# Altium PCB STM32_PCB.PcbDoc
Units mm, origin at the board's own origin, x right, y up, seen from the top; angles counter-clockwise.
Board outline 41.27 x 38.35 mm, 4 copper layers (L1 (Signal), L2 (GND), L3 (GND), L4 (Signal)), stack 1.57 mm thick; 34 components, 27 nets, 169 pads, 54 vias.
Unrouted connection lines stored in the file: 2.
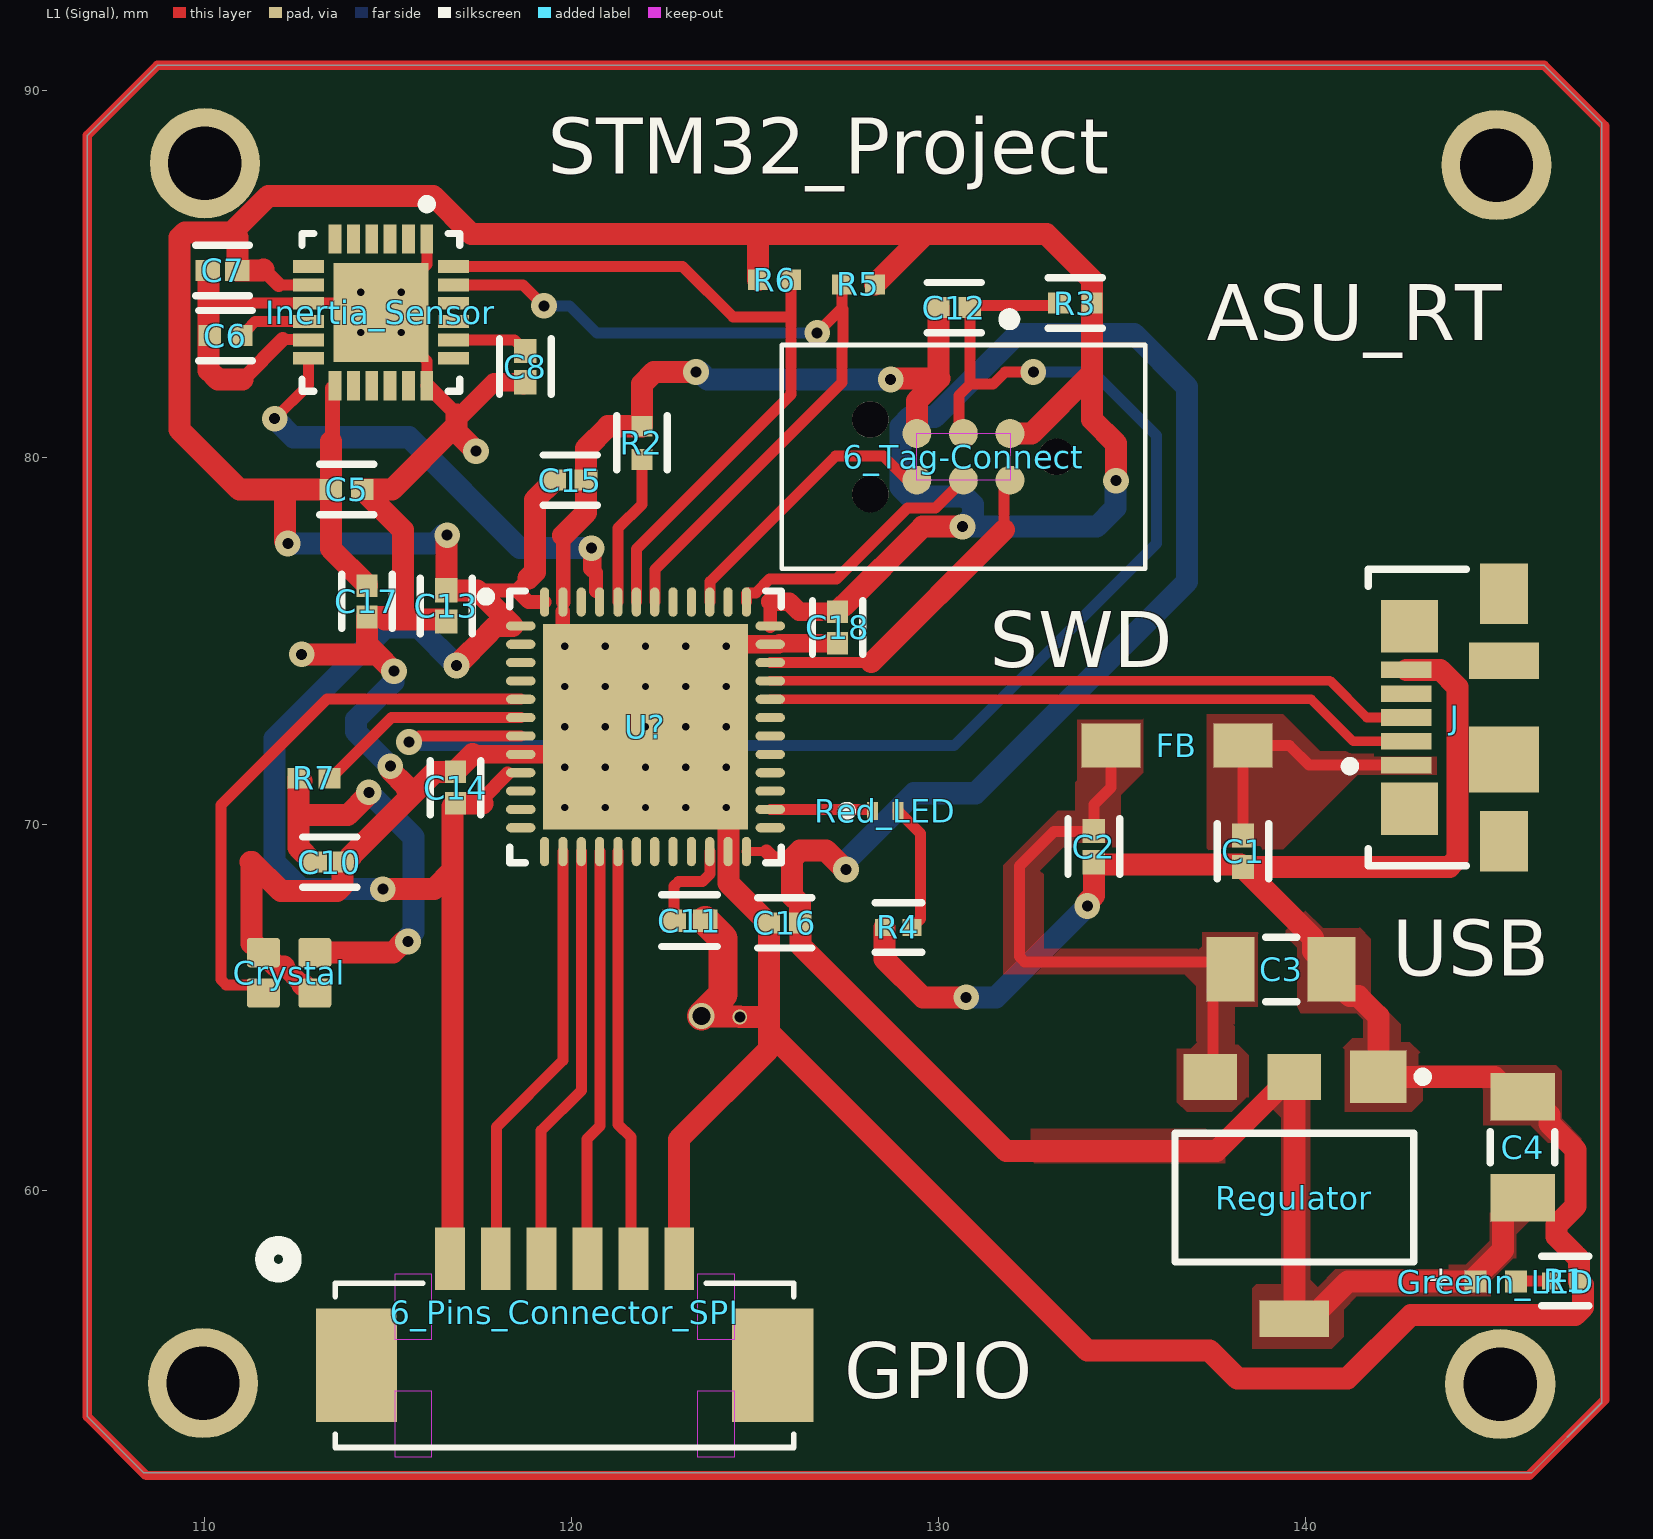
[diagram p0: L1 (Signal) view]
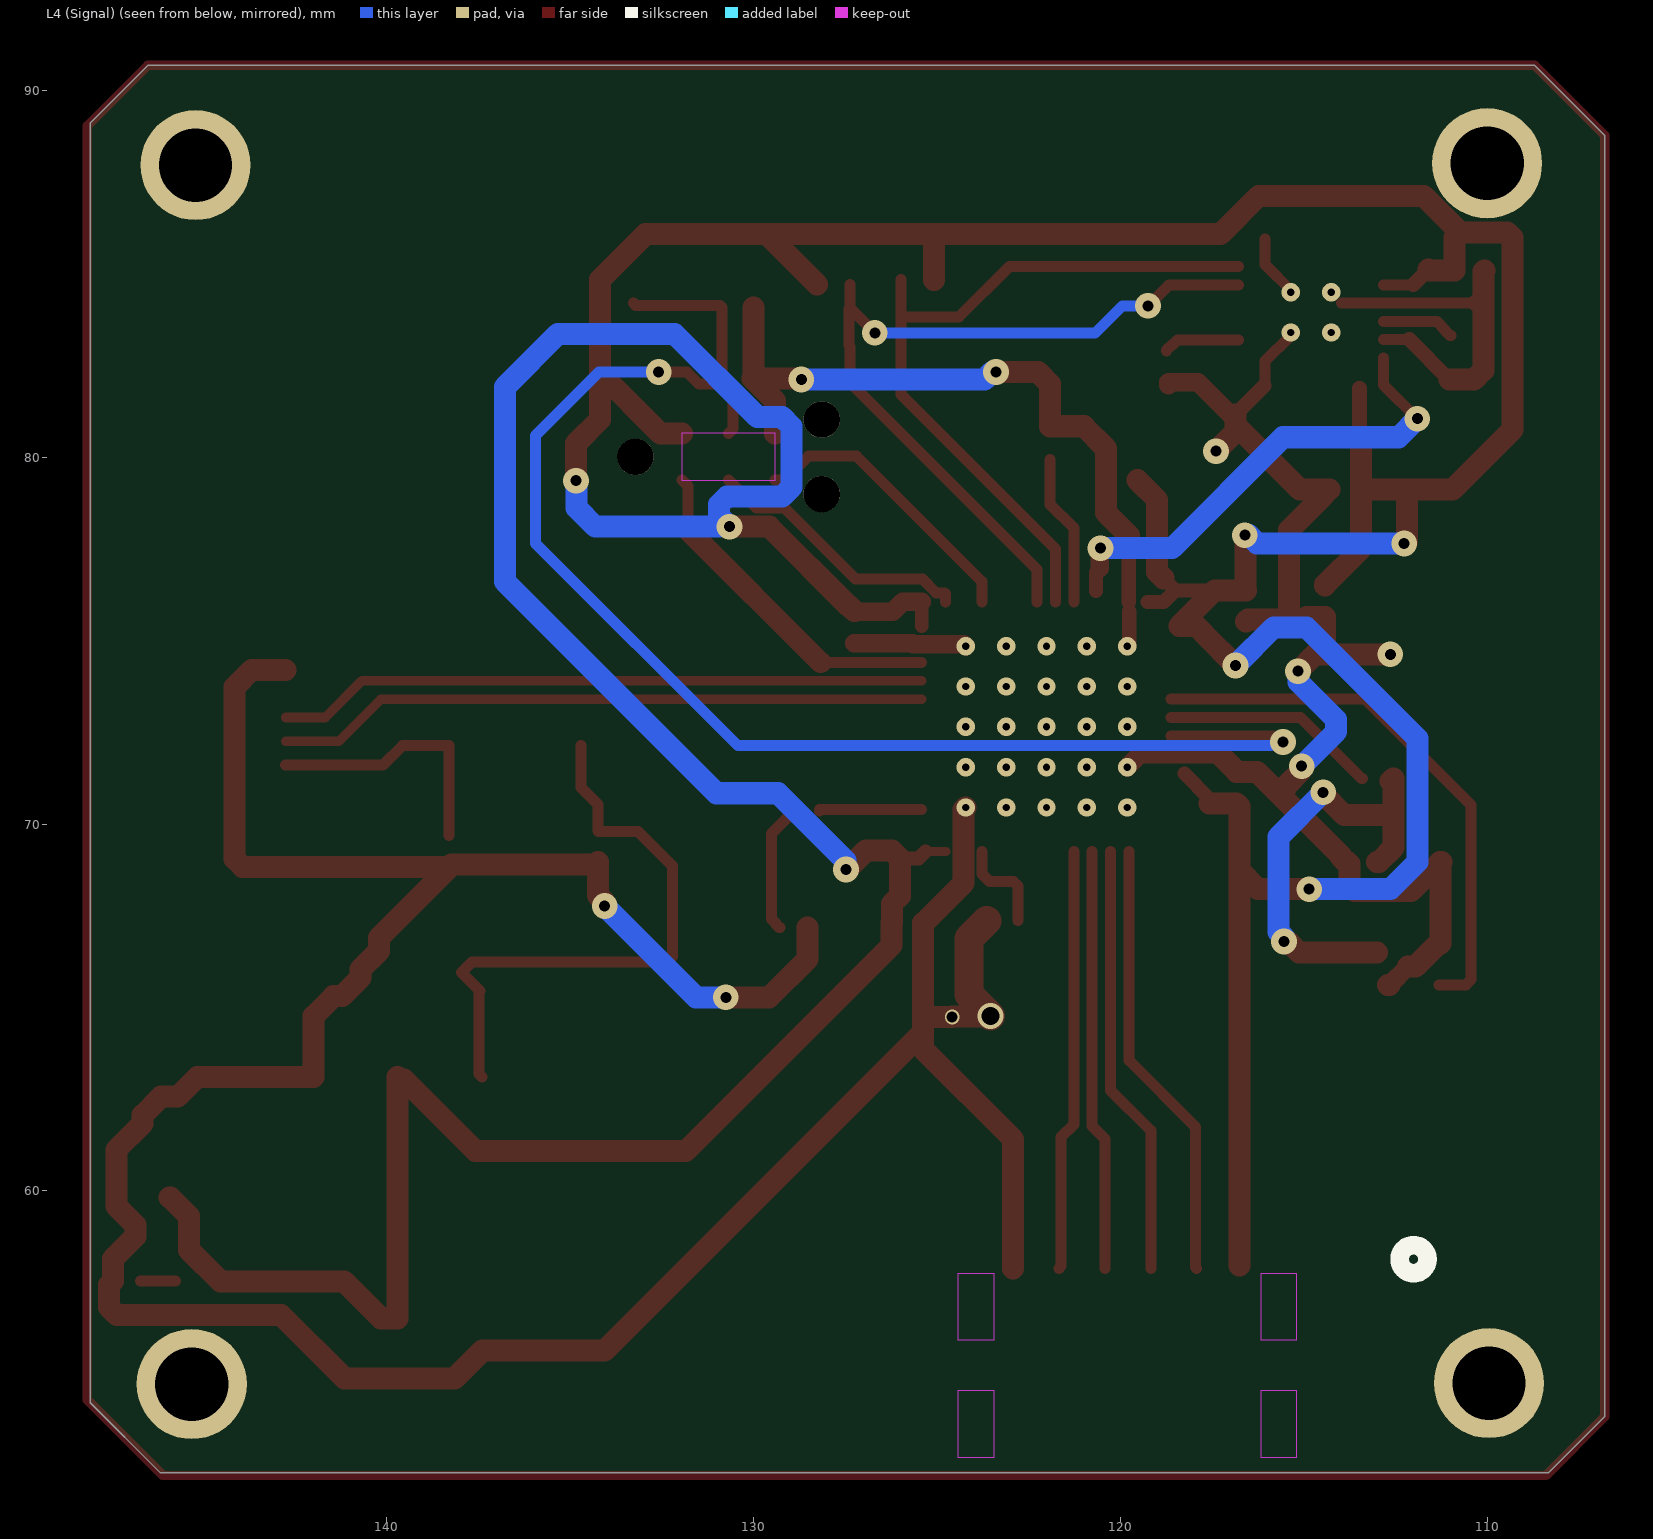
[diagram p1: L4 (Signal) view, seen from below]
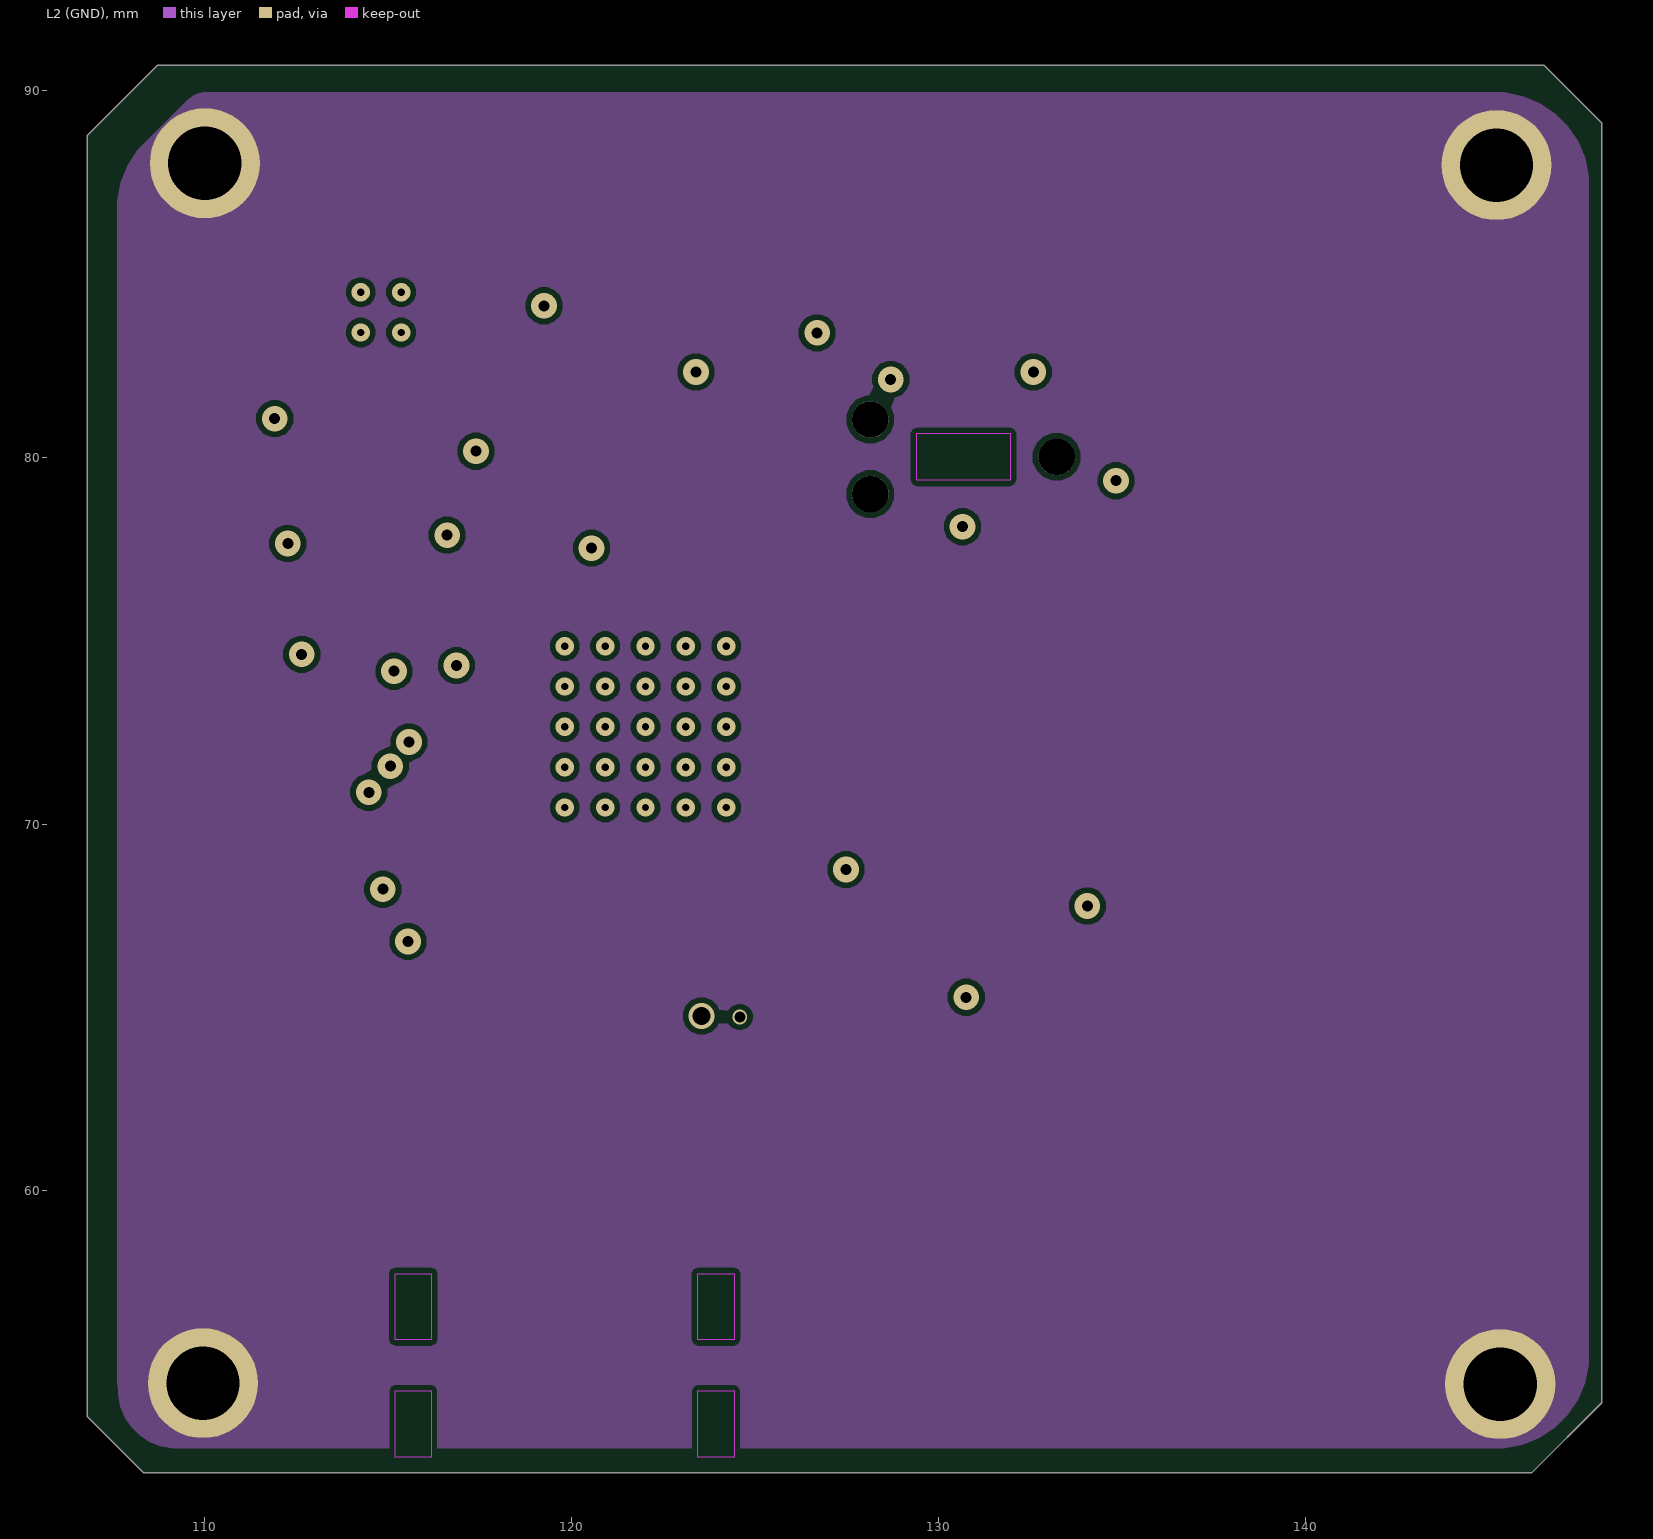
[diagram p2: L2 (GND)]
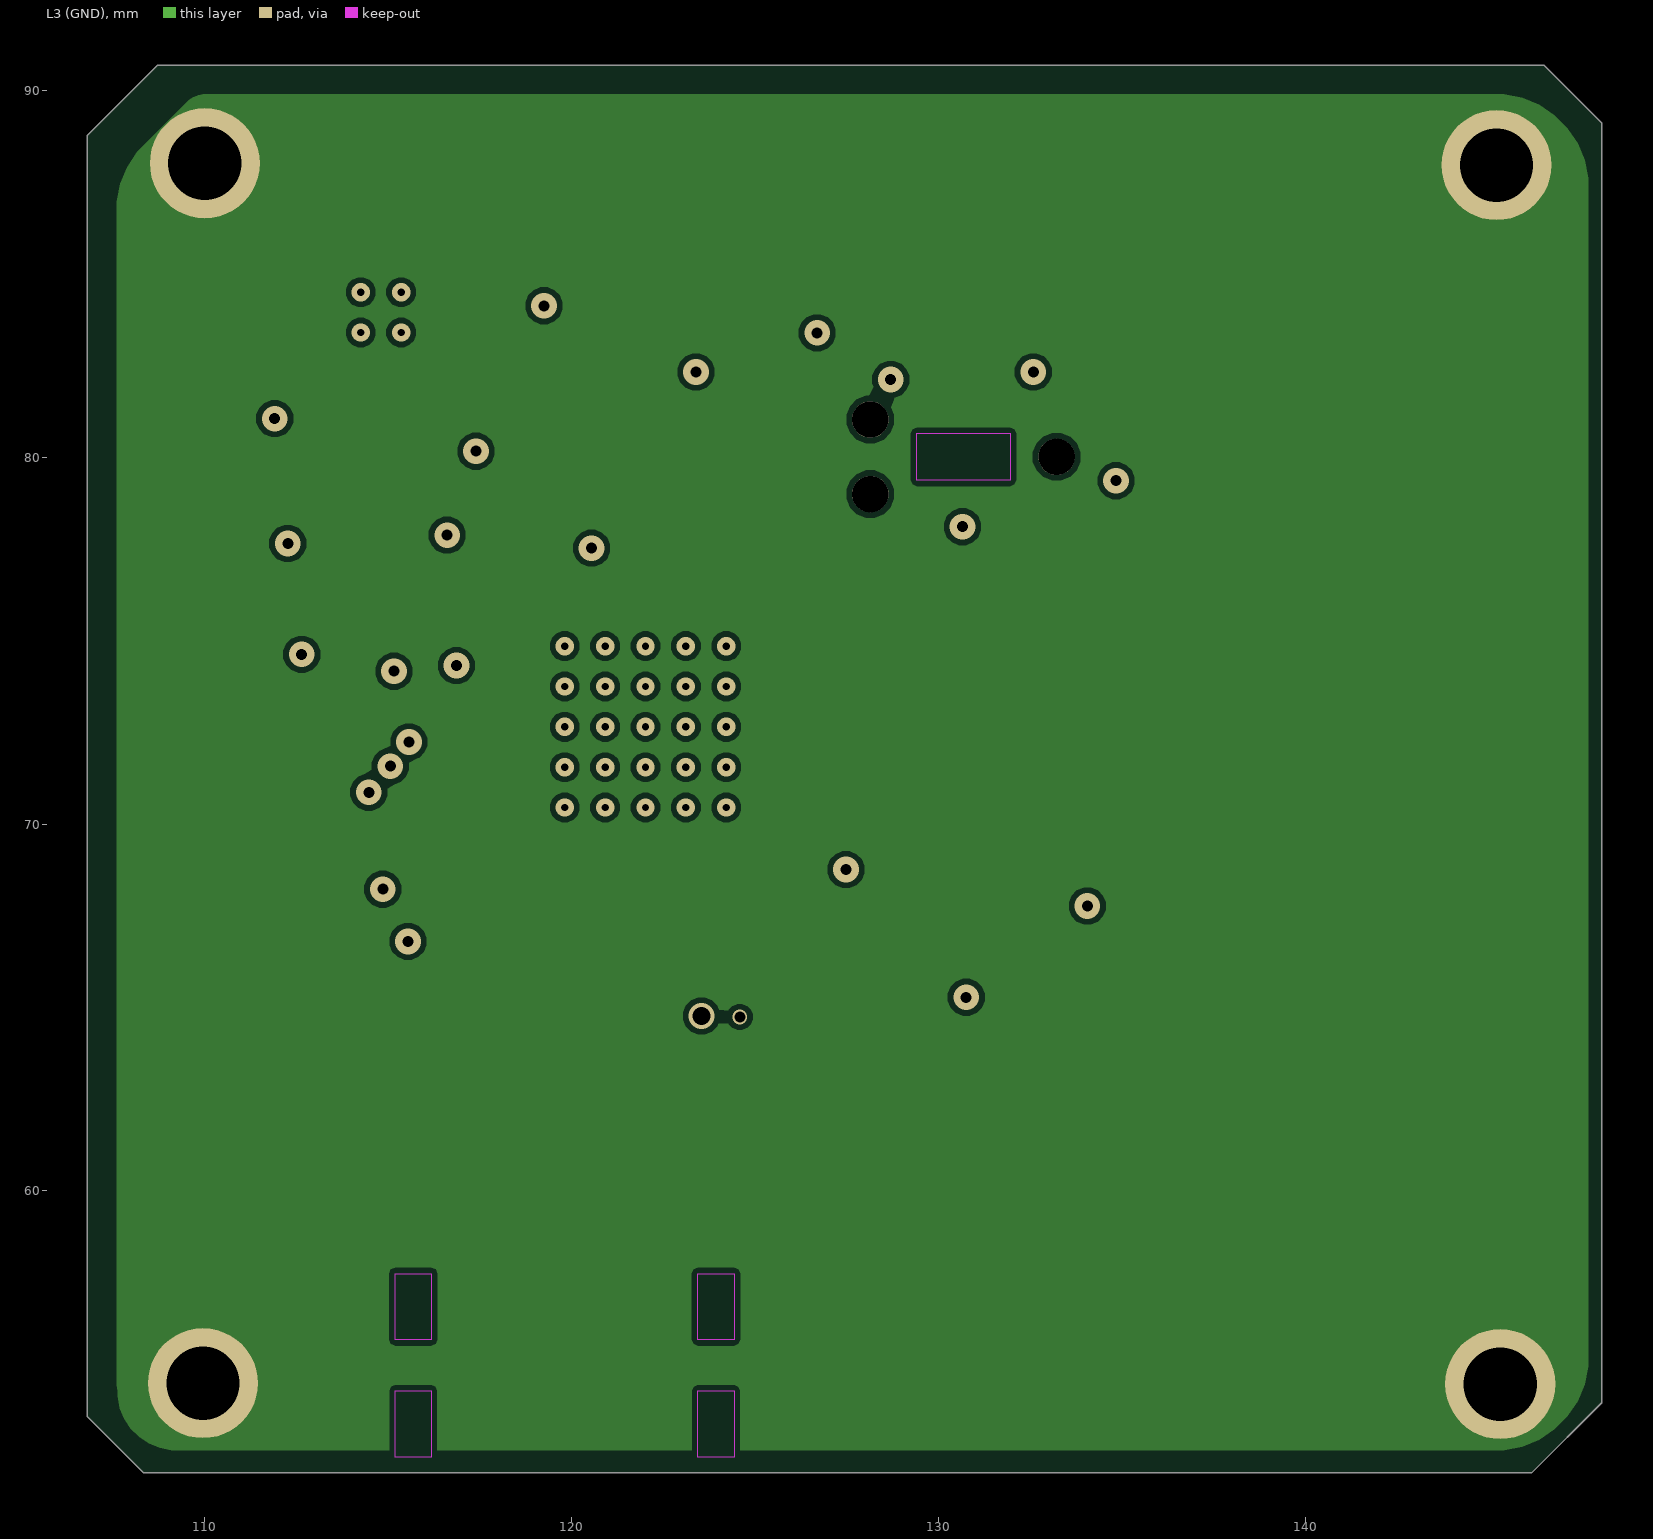
[diagram p3: L3 (GND)]
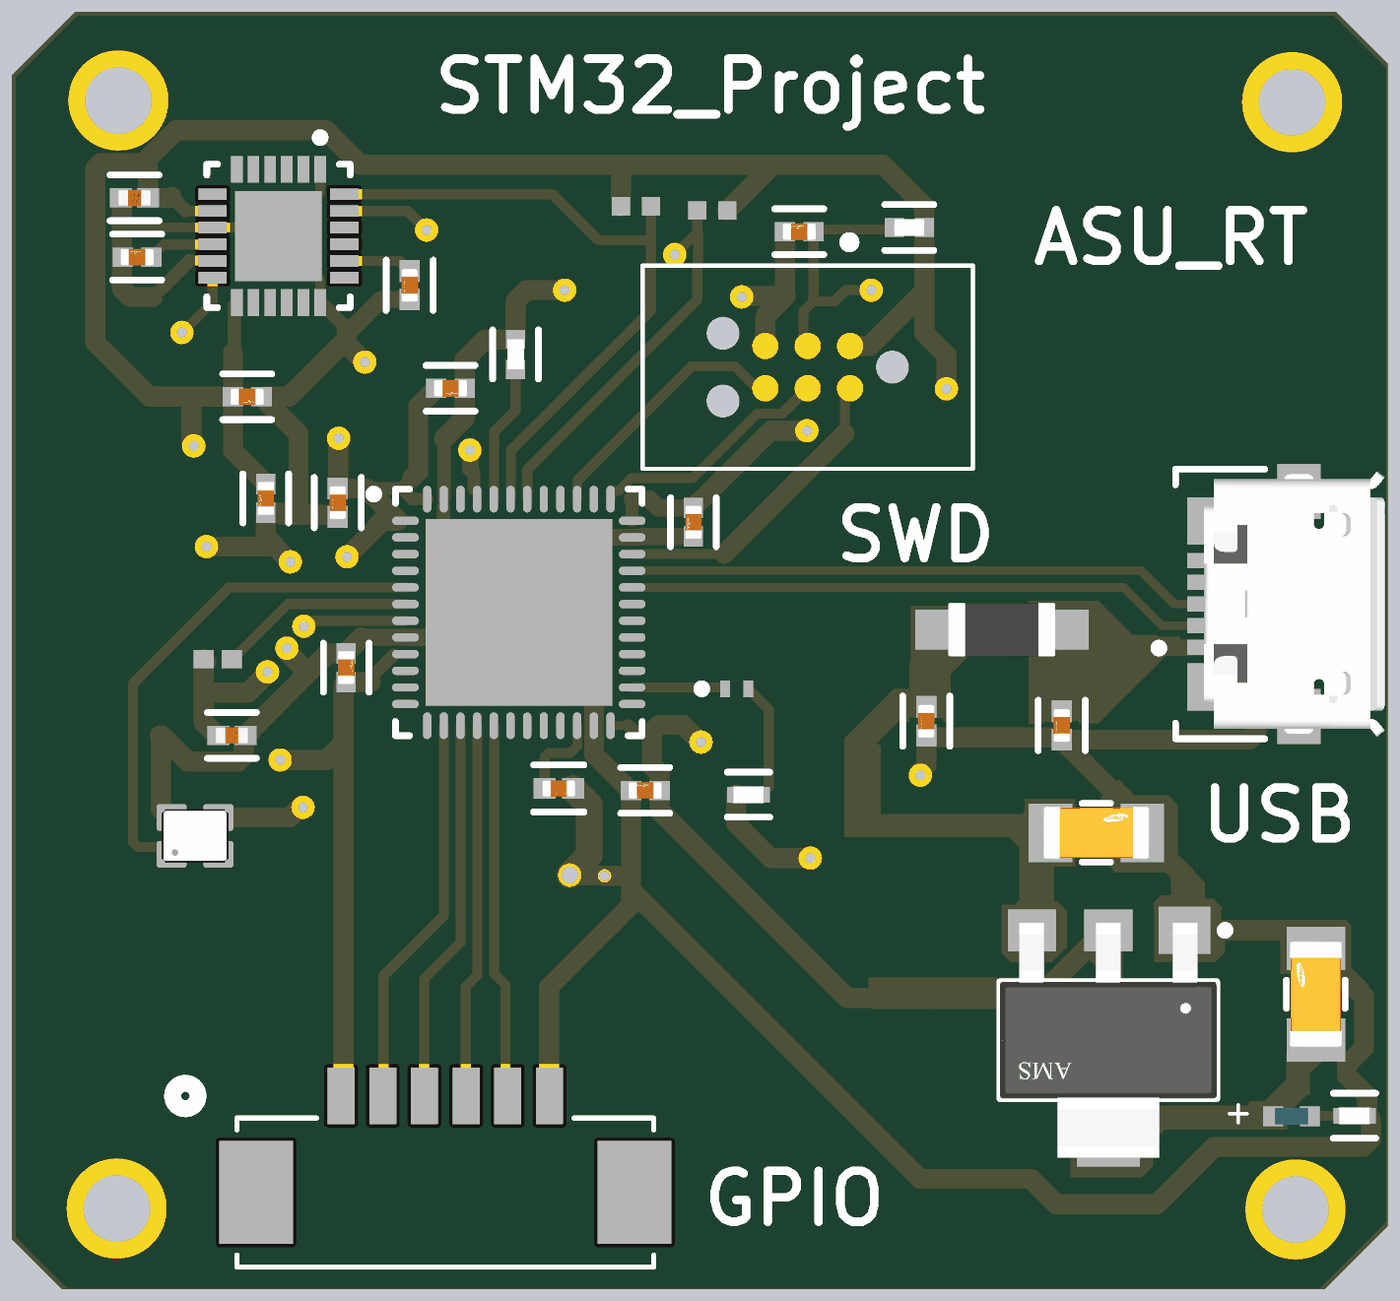
[diagram p4: 3D render of the assembled board from above, using the file's embedded part models]

## Layer stack, top to bottom
Top Solder: solder mask 0.0254, SM-001, Dk 4
L1 (Signal): signal copper 0.035
Dielectric 1: prepreg 0.2, PP-017, Dk 4.6
L2 (GND): signal copper 0.0175
Dielectric 3: core 1.065, Core-039, Dk 4.6
L3 (GND): signal copper 0.0175
Dielectric 5: prepreg 0.2, PP-017, Dk 4.6
L4 (Signal): signal copper 0.035
Bottom Solder: solder mask 0.0254, SM-001, Dk 4

## Board outline
106.807,53.848 108.331,52.324 146.177,52.324 148.082,54.229 148.082,89.108 146.512,90.678 108.712,90.678 106.807,88.773

## Design rules (kind name [scope] priority, off if disabled: settings)
Clearance Clearance_1 [InComponent('Inertia_Sensor')] p1: gap=0.15 ignorepadtopadclearanceinfootprint=TRUE
Clearance [All] p2: gap=0.15 ignorepadtopadclearanceinfootprint=TRUE
DiffPairsRouting [All] p1: maxlimit=0.254 minlimit=0.203 mostfreqgap=0.254 toplayer_maxgap=0.203 toplayer_prefgap=0.203 toplayer_minwidth=0.26 toplayer_maxwidth=0.26 toplayer_prefwidth=0.26 bottomlayer_maxgap=0.203 bottomlayer_prefgap=0.203 bottomlayer_minwidth=0.26 bottomlayer_maxwidth=0.26 bottomlayer_prefwidth=0.26 impedanceprofiledriven=TRUE impedanceprofileid={DD2EC57B-CB65-49B1-A0C3-37D0689490D2} impedanceprofilevalue=90.000000 maxuncoupledlength=12.7
MinimumSolderMaskSliver [All] p1: minsoldermaskwidth=0.1
PolygonConnect [All] p1: connectstyle=Direct reliefconductorwidth=0.254 reliefentries=4 polygonreliefangle="90 Angle" airgapwidth=0.254
RoutingVias [All] p1: holewidth=0.3 width=0.7 viastyle="Through Hole" minholewidth=0.25 minwidth=0.55 maxholewidth=0.4 maxwidth=0.9
SolderMaskExpansion [All] p1: expansion=0 istentingtop=FALSE
SupplyNets "Schematic Supply Nets_4" [InNet('GND')] p1: voltage=0.000
SupplyNets "Schematic Supply Nets_3" [InNet('VBUS')] p2: voltage=0.000
SupplyNets "Schematic Supply Nets_2" [InNet('+3v3')] p3: voltage=0.000
SupplyNets "Schematic Supply Nets_1" [InNet('+5')] p4: voltage=0.000
UnRoutedNet [All] p1: checkbadconnections=TRUE
Width [All] p1: maxlimit=1 minlimit=0.2 preferedwidth=0.3 midlayer1_minwidth=0.254 midlayer1_maxwidth=0.254 midlayer1_prefwidth=0.254 midlayer2_minwidth=0.254 midlayer2_maxwidth=0.254 midlayer2_prefwidth=0.254 minimp=50.000000 maximp=50.000000 favimp=50.000000
27 further rules are at their usual default settings.

## Classes and differential pairs
differential pair class BIFF_USB: USB_D
differential pair USB_D: +USB_D_P -USB_D_N

## Components (designator, comment, footprint, x,y, rotation, side; value= is the part's Value field where it differs from the comment)
6_Pins_Connector_SPI "532610671" CONN_532610001-SD_06_MOL 119.812,55.245 r180 top
6_Tag-Connect "TC2030-IDC-NL" TAG_TC2030-IDC-NL 130.683,80.01 r180 top
C1 "2.2uf" FP-0402-L_1_0_0_10-W_0_5-IPC_B 138.303,69.26 r270 top
C2 "2.2uf" FP-0402-L_1_0_0_10-W_0_5-IPC_B 134.239,69.387 r270 top
C3 "22uf" FP-CL31-IPC_B 139.34,66.04 r0 top
C4 "22uf" FP-CL31-IPC_B 145.923,61.193 r90 top
C5 "100nf" FP-GMD155-0_05-IPC_B 113.871,79.121 r0 top
C6 "100nf" FP-GMD155-0_05-IPC_B 110.569,83.312 r180 top
C7 "10nf" FP-C0402-BB-IPC_B 110.49,85.09 r0 top value="10,000 pF"
C8 "2n2" FP-0402-L_1_0_0_10-W_0_5-IPC_B 118.745,82.468 r270 top
C10 "10pf" FP-C0402-BB-IPC_B 113.411,68.961 r0 top value="10 pF"
C11 "2.2uf" FP-0402-L_1_0_0_10-W_0_5-IPC_B 123.218,67.368 r0 top
C12 "100nf" FP-GMD155-0_05-IPC_B 130.429,84.074 r180 top
C13 "2.2uf" FP-0402-L_1_0_0_10-W_0_5-IPC_B 116.586,75.946 r270 top
C14 "100nf" FP-GMD155-0_05-IPC_B 116.84,70.993 r90 top
C15 "100nf" FP-GMD155-0_05-IPC_B 119.967,79.375 r0 top
C16 "100nf" FP-GMD155-0_05-IPC_B 125.809,67.31 r180 top
C17 "100nf" FP-GMD155-0_05-IPC_B 114.427,76.073 r270 top
C18 "100nf" FP-GMD155-0_05-IPC_B 127.254,75.359 r270 top
Crystal "24MHZ" EPSON-FA-128_V 112.305,65.947 r90 top
FB "120R" WE-CBF_1206_L3.2W1.6H1.1_HC 136.503,72.136 r180 top
Greenn_LED "D" WL-SMCC_0402_L1W0.5H0.4 145.195,57.531 r180 top
Inertia_Sensor "MPU-6050" IS-QFN-24_V 114.808,83.947 r270 top
J "473460001" FP-473460001-MFG 145.065,72.905 r90 top (schematic designator J?)
R1 "1K" FP-CR0402-IPC_C 147.086,57.548 r180 top
R2 "10K" FP-CRCW0402-e3-IPC_B 121.92,80.391 r270 top
R3 "10K" FP-CRCW0402-e3-IPC_B 133.731,84.201 r0 top
R4 "1K" FP-CR0402-IPC_C 128.907,67.183 r180 top
R5 "2.2k" RESC1005X40X25NL05T05 127.82,84.709 r0 top
R6 "2.2k" RESC1005X40X25NL05T05 125.534,84.836 r180 top
R7 "0R" RESC1005X40X25NL05T10 112.986,71.247 r0 top value=0
Red_LED "R" PNSC-CHIP-2_V 128.555,70.358 r180 top
Regulator "AMS1117-3.3" FP-AMS1117-IPC_C 139.7,59.817 r270 top
U? "STM32F411CEU6" STM-UFQFPN48_L 122.018,72.651 r0 top

## Footprints (in the part's own frame and the unit in brackets; to place one, negate y for a bottom-side part, rotate by r counter-clockwise, add the part's x,y. Pads: shape width x height; smd on the part's side, far side on the other; paste and mask are expansions set on the pad)
CONN_532610001-SD_06_MOL [mil]
  rect 32x67 smd paste+0 mask+4.02: 1(123.03,-114.35) 2(73.82,-114.35) 3(24.61,-114.35) 4(-24.61,-114.35) 5(-73.82,-114.35) 6(-123.03,-114.35)
  rect 87x122 smd paste+0 mask+4.02: 7(-223.43,-0.18) 8(223.43,-0.18)
  Keep-Out Layer region: -142.9,27.32 -181.9,27.32 -181.9,98.32 -142.9,98.32
  Keep-Out Layer region: 181.9,27.32 142.9,27.32 142.9,98.32 181.9,98.32
  Keep-Out Layer region: -142.9,-98.67 -181.9,-98.67 -181.9,-27.67 -142.9,-27.67
  Keep-Out Layer region: 181.9,-98.67 142.9,-98.67 142.9,-27.67 181.9,-27.67
  silkscreen extent -246,-129 322,88
EPSON-FA-128_V [mm] "SMD, 4-Leads, Body 2x1.6mm, Pitch 1.45mm"
  rrect20% 0.8x0.9 smd: 1(-0.55,0.7) 2(-0.55,-0.7) 3(0.55,-0.7) 4(0.55,0.7)
  body extent -0.8,-1 0.8,1, height 0.4
FP-0402-L_1_0_0_10-W_0_5-IPC_B [mm]
  rect 0.66x0.612 smd paste+0 mask+0: 1(-0.426,0) 2(0.426,0)
  silkscreen extent -0.76,-0.71 0.76,0.71, body extent -0.91,-0.46 0.91,0.46, height 0.25
FP-473460001-MFG [mm]
  rect 0.45x1.38 smd paste+0 mask+0: 1(-1.3,2.31) 2(-0.65,2.31) 3(0,2.31) 4(0.65,2.31) 5(1.3,2.31)
  rect 1.425x1.55 smd paste+0 mask+0: 6(-2.487,2.225) 7(2.488,2.225)
  rect 1.65x1.3 smd paste+0 mask+0: 8(-3.375,-0.35) 11(3.375,-0.35)
  rect 1.8x1.9 smd paste+0 mask+0: 9(-1.15,-0.35)
  rect 1x1.9 smd paste+0 mask+0: 10(1.55,-0.35)
  silkscreen extent -4.05,0.67 4.04,3.97, body extent -4.3,-2.48 4.3,3.45, height 0.25
FP-AMS1117-IPC_C [mm]
  rect 1.425x1.55 smd paste+0 mask+0: 1(-3.295,2.29)
  rect 1.255x1.456 smd paste+0 mask+0: 2(-3.295,0) 3(-3.295,-2.29)
  rect 1x1.9 smd paste+0 mask+0: 4(3.295,0)
  silkscreen extent -3.42,-3.25 1.75,3.63, body extent -3.9,-3.35 3.9,3.35, height 0.25
FP-C0402-BB-IPC_B [mm]
  rect 0.665x0.572 smd paste+0 mask+0: 1(-0.404,0) 2(0.404,0)
  silkscreen extent -0.74,-0.69 0.74,0.69, body extent -0.89,-0.44 0.89,0.44, height 0.25
FP-CL31-IPC_B [mm]
  rect 1.305x1.758 smd paste+0 mask+0: 1(-1.376,0) 2(1.376,0)
  silkscreen extent -0.42,-0.88 0.42,0.88, body extent -2.28,-1.13 2.28,1.13, height 0.25
FP-CR0402-IPC_C [mm]
  rect 0.515x0.472 smd paste+0 mask+0: 1(-0.379,0) 2(0.379,0)
  silkscreen extent -0.64,-0.67 0.64,0.67, body extent -0.74,-0.38 0.74,0.38, height 0.25
FP-CRCW0402-e3-IPC_B [mm]
  rect 0.568x0.572 smd paste+0 mask+0: 1(-0.452,0) 2(0.452,0)
  silkscreen extent -0.74,-0.69 0.74,0.69, body extent -0.89,-0.44 0.89,0.44, height 0.25
FP-GMD155-0_05-IPC_B [mm]
  rect 0.615x0.572 smd paste+0 mask+0: 1(-0.429,0) 2(0.429,0)
  silkscreen extent -0.74,-0.69 0.74,0.69, body extent -0.89,-0.44 0.89,0.44, height 0.25
IS-QFN-24_V [mm] "QFN, 24-Leads, Body 4x4mm, Pitch 0.5mm, Thermal Pad 2.7x2.6mm"
  rect 0.8x0.35 smd: 1(-2,1.25) 2(-2,0.75) 3(-2,0.25) 4(-2,-0.25) 5(-2,-0.75) 6(-2,-1.25) 13(2,-1.25) 14(2,-0.75) 15(2,-0.25) 16(2,0.25) 17(2,0.75) 18(2,1.25)
  rect 0.35x0.85 smd mask+0.102: 7(-1.25,-1.975) 8(-0.75,-1.975) 9(-0.25,-1.975) 10(0.25,-1.975) 11(0.75,-1.975) 12(1.25,-1.975) 19(1.25,1.975) 20(0.75,1.975) 21(0.25,1.975) 22(-0.25,1.975) 23(-0.75,1.975) 24(-1.25,1.975)
  rect 2.7x2.6 smd: 25(0,0)
  silkscreen extent -3.07,-2.15 2.15,2.15, body extent -2,-2 2,2, height 0.95
PNSC-CHIP-2_V [mm] "CHIP, 2-Leads, Body 1x0.5mm, Pitch 0.7mm"
  rect 0.3x0.5 smd: 1(0.35,0) 2(-0.35,0)
  silkscreen extent 0.92,-0.12 1.17,0.12, body extent -0.5,-0.25 0.5,0.25, height 0.25
RESC1005X40X25NL05T05 [mm] "Chip Resistor, 2-Leads, Body 1.00x0.50mm, IPC Medium Density"
  rect 0.55x0.55 smd: 1(-0.45,0) 2(0.45,0)
  body extent -0.53,-0.27 0.53,0.28, height 0.4
RESC1005X40X25NL05T10 [mm] "Chip Resistor, 2-Leads, Body 1.00x0.50mm, IPC Medium Density"
  rect 0.6x0.55 smd: 1(-0.425,0) 2(0.425,0)
  body extent -0.53,-0.27 0.53,0.28, height 0.4
STM-UFQFPN48_L [mm] "QFN, 48-Leads, Body 7.1x7.1mm, Pitch 0.5mm, Thermal Pad 5.6x5.6mm, IPC High Density"
  oval 0.8x0.25 smd: 1(-3.4,2.75) 2(-3.4,2.25) 3(-3.4,1.75) 4(-3.4,1.25) 5(-3.4,0.75) 6(-3.4,0.25) 7(-3.4,-0.25) 8(-3.4,-0.75) 9(-3.4,-1.25) 10(-3.4,-1.75) 11(-3.4,-2.25) 12(-3.4,-2.75) 25(3.4,-2.75) 26(3.4,-2.25) 27(3.4,-1.75) 28(3.4,-1.25) 29(3.4,-0.75) 30(3.4,-0.25) 31(3.4,0.25) 32(3.4,0.75) 33(3.4,1.25) 34(3.4,1.75) 35(3.4,2.25) 36(3.4,2.75)
  oval 0.25x0.8 smd: 13(-2.75,-3.4) 14(-2.25,-3.4) 15(-1.75,-3.4) 16(-1.25,-3.4) 17(-0.75,-3.4) 18(-0.25,-3.4) 19(0.25,-3.4) 20(0.75,-3.4) 21(1.25,-3.4) 22(1.75,-3.4) 23(2.25,-3.4) 24(2.75,-3.4) 37(2.75,3.4) 38(2.25,3.4) 39(1.75,3.4) 40(1.25,3.4) 41(0.75,3.4) 42(0.25,3.4) 43(-0.25,3.4) 44(-0.75,3.4) 45(-1.25,3.4) 46(-1.75,3.4) 47(-2.25,3.4) 48(-2.75,3.4)
  rect 5.6x5.6 smd: 49(0,0)
  silkscreen extent -4.47,-3.7 3.7,3.7, body extent -3.55,-3.55 3.55,3.55, height 0.6
TAG_TC2030-IDC-NL [mil]
  round 30.98 smd paste-39.37: 1(-50,-25) 2(-50,25) 3(0,-25) 4(0,25) 5(50,-25) 6(50,25)
  round 39.02 hole 39.02 unplated: ""(-100,0) ""(100,-40) ""(100,40)
  Keep-Out Layer region: 50,-25.03 -50.06,-25.03 -50.06,25 50,25
  silkscreen extent -195,-154 195,120
WE-CBF_1206_L3.2W1.6H1.1_HC [mm] "SMD EMI Suppression Ferrite  Bead, body 3.20x1.60mm"
  rect 1.6x1.2 smd: 1(-1.8,0) 2(1.8,0)
  body extent -1.6,-0.8 1.6,0.8, height 1.1
WL-SMCC_0402_L1W0.5H0.4 [mm] "SMD Mono-color Chip LED Compact, body 1x0.5mm"
  rect 0.6x0.6 smd: 1(-0.55,0) 2(0.55,0)
  body extent -0.5,-0.25 0.5,0.25, height 0.4

## Part data
6_Pins_Connector_SPI: "Conn Shrouded Header (4 Sides) HDR 6 POS 1.25mm Solder RA Side Entry SMD PicoBladeâ„¢ T/R", Package=None, Check_prices=https://www.snapeda.com/parts/532610671/Molex/view-part/?ref=eda, MF=Molex, MP=532610671, SnapEDA_Link=https://www.snapeda.com/parts/532610671/Molex/view-part/?ref=snap
6_Tag-Connect: "CABLE ADAPTER 6 POS", Package=None, Availability=Unavailable, MP=TC2030-IDC-NL, Price=None
C1 C2 C8 C11 C13: library part CMP-14477-003358-2, "None", Capacitance=2.2uF, Case Code (Imperial)=0402, Case Code (Metric)=1005, Dielectric=X5R, Max Operating Temperature=85°C, Min Operating Temperature=-55°C, Package Quantity=1, Resistor Type=Ceramic, Tolerance=20%, Voltage Rating=16V, Case/Package=0402, Halogen Free="Halogen Free", Height=0.5mm, Lead Free="Lead Free", Length=1mm, Mount="Surface Mount", Packaging="Tape and Reel", RoHS Compliant=Yes, Termination=SMD/SMT, Thickness=0.022inch, Voltage Rating (DC)=16V, Width=0.02inch
C3 C4: library part CMP-13271-003943-1, "Cap Ceramic 22uF 16V X6S ±10% SMD 1206 +105°C Embossed T/R", Capacitance=22uF, Case Code (Imperial)=1206, Case Code (Metric)=3216, Dielectric=X6S, Max Operating Temperature=105°C, Min Operating Temperature=-55°C, Package Quantity=1, Tolerance=10%, Voltage Rating=16V, Case/Package=1206, Depth=1.6mm, Height=1.6mm, Length=3.2mm, Mount="Surface Mount", Packaging="Tape and Reel", Radiation Hardening=No, Thickness=0.071inch, Width=0.063inch
C5 C6 C12 C14 C15 C16 C17 C18: library part CMP-06035-061958-1, "Wire Bonding/AuSn Soldering Mount Chip Multilayer Ceramic Capacitors for General Purpose, 0402, 0.10uF, X5R, 15%, 20%, 16V"
C7: library part CMP-2008-03066-2, "Multilayer Ceramic Capacitor, C Series, 0.01 - F, - 5%, X7R, 16 V, 0402 [1005 Metric] Rohs Compliant: Yes", Capacitance="10,000 pF", Manufacturer=Kemet, Manufacturer Part Number=C0402C103J4RACTU, Package=C0402-BB, Temperature="-55°C to +125°C", Temperature Characteristic=X7R, Temperature Coefficient=15%, Temperature Range High=+125°C, Temperature Range Low=-55°C, Tolerance=0.05, Voltage Rating="16 V", Automotive=No, Category=Cap, ComponentLink2Description=Datasheet, ComponentLink2URL=https://content.kemet.com/datasheets/KEM_C1002_X7R_SMD.pdf, Device Class L1="Passive Components", Device Class L2=Capacitors, Device Class L3="Ceramic Capacitors", Digikey Description="Multilayer Ceramic Capacitor, C Series, 0.01 - F, - 5%, X7R, 16 V, 0402 [1005 Metric] Rohs Compliant: Yes", Height=0.55mm, Ipc Land Pattern Name=CAPC10050X50, Lead Free=Yes, Material=Ceramic, Mouser Description="Multilayer Ceramic Capacitors MLCC - SMD/SMT 16volts 10000pF X7R 5%", Octopart=https://octopart.com/c0402c103j4ractu-kemet-128602, RoHS=TRUE
C10: library part CMP-03020-005426-2, "CAP CER 10PF 16V NP0 0402", Capacitance="10 pF", Manufacturer=Kemet, Manufacturer Part Number=C0402C100J4GAC7867, Package=C0402-BB, Temperature="-55°C to +125°C", Temperature Characteristic=C0G, Temperature Coefficient=15%, Temperature Range High=+125°C, Temperature Range Low=-55°C, Tolerance=0.05, Voltage Rating="16 V", Automotive=No, Category=Cap, ComponentLink2Description=Datasheet, ComponentLink2URL=https://content.kemet.com/datasheets/KEM_C1002_X7R_SMD.pdf, Device Class L1="Passive Components", Device Class L2=Capacitors, Device Class L3="Ceramic Capacitors", Digikey Description="CAP CER 10PF 16V NP0 0402", Height=0.55mm, Ipc Land Pattern Name=CAPC10050X50, Lead Free=Yes, Material=Ceramic, Octopart=https://octopart.com/c0402c100j4gac7867-kemet-1500972, RoHS=TRUE
Crystal: library part CMP-003-00028-1, "Crystal, 24 MHz, +/- 10 ppm, -20 to 75 degC, 4-Pin SMD, RoHS, Tape and Reel", Case/Package=SMD/SMT, Frequency=24MHz, Load Capacitance=12pF, Max Operating Temperature=75°C, Min Operating Temperature=-20°C, ESR=80, Mounting Technology=SMT, Pins=4, RoHS Compliant=Yes
FB: library part CMP-0220-00020-2, Case Code (Imperial)=1206, Case Code (Metric)=3216, Case/Package=SMD/SMT, Current Rating=3A, DC Resistance (DCR)=30mΩ, Inductance=20.8nH, Max Operating Temperature=125°C, Min Operating Temperature=-55°C, Test Frequency=100MHz, Tolerance=25%, Core Material=Ferrite, Depth=1.6mm, Height=1.1mm, Impedance=120Ω, Lead Free="Lead Free", Length=3.2mm, Max Current Rating=3A, Max DC Current=3A, Mount="Surface Mount", NexarPartId=7861705, Number of Lines=1, Packaging=Digi-Reel®, REACH SVHC=Unknown, Resistance=30mΩ, RoHS=Compliant, Shielding=Unshielded, Termination=SMD/SMT, Weight=28.009329mg, Width=1.6mm
Greenn_LED: library part CMP-03913-90235559-3, "Wurth Elektronik LED, WL-SMCC, 1005 (0402), 570 nm, 1 x 0.5 x 0.4mm", Case/Package=0402, Color=Green, Forward Current=60mA, Forward Voltage=2V, Manufacturer Lifecycle Status=ACTIVE, Max Junction Temperature (Tj)=95°C, Max Operating Temperature=85°C, Max Reverse Voltage (DC)=5V, Min Operating Temperature=-40°C, Power Dissipation=75mW, Dominant Wavelength=570nm, Height=400µm, Length=1mm, Lifecycle Status=Production, Luminous Intensity=50mcd, Packaging="Tape and Reel", Peak Wavelength=572nm, Reverse Voltage=5V, RoHS=Compliant, Viewing Angle=120°, Wavelength=570nm, Width=500µm, YEOL="1 = Estimated lifetime > 10 years"
Inertia_Sensor: library part CMP-1753-00002-2, "3-Axis Gyroscope, Accelerometer and a Digital Motion Processor(TM) (DMP), 2.375 to 3.46 V, -40 to 85 degC, 24-Pin QFN, RoHS, Tape and Reel", Manufacturer=InvenSense, Standard Package=5,000, Category=Sensors,Transducers, Datasheet URL=http://datasheet.octopart.com/MPU-6050-InvenSense-datasheet-14421344.pdf, Datasheet Version="Rev. 3.3, 05/2012", Dynamic Catalog=MPU-6000™Series, Family=Multifunction, Featured Product=MPU-60506-Axis,IntegratedI²CSolution, Manufacturer URL=http://www.invensense.com/, Online Catalog=MPU-6000™Series, Other Names="1428-1007-2 / MPU6050", Output Type=Digital, Sensor Type=MotionTracking, Unit PriceUSD=Digital
J: library part CMP-2000-05246-2, "CONN RCPT USB2.0 MICRO B SMD R/A", Current Rating=1.8A, Manufacturer=Molex, Package=0, Temperature="-30°C to +85°C", Temperature Range High=+85°C, Temperature Range Low=-30°C, Voltage Rating=30V, Automotive=No, Category=Conn, ComponentLink2Description=Datasheet, ComponentLink2URL=https://www.molex.com/webdocs/datasheets/pdf/en-us/0473460001_IO_CONNECTORS.pdf, Conn Orientation="Right Angle", Contact Material=Gold,Nickel, Device Class L1=Connectors, Device Class L2="USB Connectors", Device Class L3=unset, Digikey Description="CONN RCPT USB2.0 MICRO B SMD R/A", Footprint Url=https://www.molex.com/pdm_docs/sd/473460001_sd.pdf, Height=2.945mm, Is Female=yes, Lead Free=Yes, Manufacturer Part Number=473460001, Number Of Contacts=5, Octopart=https://octopart.com/47346-0001-molex-7164928, Pitch=0.65mm, RoHS=TRUE, Shielding=true, Usb Standard="USB 2.0"
R1 R4: library part CMP-2002-05519-2, "Thick Film Chip Resistors 0402 1kΩ 0.0625W 5% 200ppm/°C", Case Code (Imperial)=0402, Case Code (Metric)=1005, Max Operating Temperature=125°C, Max Power Dissipation=63mW, Min Operating Temperature=-55°C, Package Quantity=10000, Power Rating=62.5mW, Resistance=1kR, Temperature Coefficient=200ppm/°C, Tolerance=5%, Voltage Rating=50V, Case/Package=0402, Composition="Thick Film", Contact Plating=Tin, Depth=0.5mm, Height=0.016inch, Length=1mm, Military Standard=Not, Mount="Surface Mount", Number of Terminations=2, Packaging="Tape and Reel", Radiation Hardening=No, Termination=SMD/SMT, Thickness=356um, Width=0.02inch
R2 R3: library part CMP-2002-08136-3, "RES Thick Film, 10kΩ, 5%, 0.063W, 200ppm/°C, 0402", Case Code (Imperial)=0402, Case Code (Metric)=1005, Max Operating Temperature=155°C, Max Power Dissipation=63mW, Min Operating Temperature=-55°C, Package Quantity=1, Resistance=10kR, Temperature Coefficient=200ppm/°C, Tolerance=5%, Voltage Rating=50V, Case/Package=0402, Composition="Thick Film", Contact Plating=Tin, Depth=0.5mm, Features="Automotive AEC-Q200", Height=0.016inch, Length=1mm, Military Standard=Not, Mount="Surface Mount", Number of Terminations=2, Packaging="Tape and Reel", Power Rating=63mW, Radiation Hardening=No, Termination=SMD/SMT, Weight=2.3E-05oz, Width=0.5mm
R5 R6: library part CMP-2002-08453-1, Manufacturer="Vishay Dale", Part Number=CRCW04022K20JNED
R7: library part CMP-009-00008-5, "Chip Resistor, 0 Ohm, 0.25 W, -55 to 155 degC, 1206 (3216 Metric)", Case/Package=1206, Max Operating Temperature=155°C, Min Operating Temperature=-55°C, Power=250mW, Tolerance=0.05%, Voltage Rating=200V, Mounting Technology=SM, Pins=2, RoHS Compliant=True
Red_LED: library part CMP-0456-00001-2, "Hight Bright Surface Mounting Chip LED (Red), 55 mW, -30 to 85 degC, 1.0 x 0.5 x 0.2 mm  SMD", Forward Voltage="1.95 V", Manufacturer=Panasonic, PartNumber=LNJ247W82RA, Reverse Current="100 uA", ComponentLink1Description="Manufacturer URL", ComponentLink1URL=http://www.semicon.panasonic.co.jp/en/, ComponentLink2Description=Datasheet, ComponentLink2URL=http://www.semicon.panasonic.co.jp/ds4/LNJ247W82RA_E.pdf, ComponentLink3Description="Package Specification", ComponentLink3URL=http://www.semicon.panasonic.co.jp/ds4/LNJ247W82RA_E.pdf, Dominant Emission Wavelength="630 nm", Luminous Intensity="16 mcd", Mounting Technology="Surface Mount", PackageDescription="2-Pin CHIP, Body 1x0.5mm, Pitch 0.7mm", PackageReference=CHIP-2, Peak Emission Wavelength="645 nm", Spectral half band width="20 nm"
Regulator: library part CMP-209535-000001-1, "LDO Voltage Regulators 1A, 3.3V", Dropout Voltage=1.1V, Manufacturer="Advanced Monolithic Systems", Max Junction Temp=+125°C, Max Power Dissipation=1.2W, Max Supply Voltage=15V, Nominal Supply Current=5mA, Output Current=1A, Output Voltage=3.3V, Package=AMS1117, Supplier Part Number=1241867P, Temperature="-40°C to +125°C", Temperature Range Low=-40°C, Automotive=No, Category=IC, ComponentLink2Description=Datasheet, ComponentLink2URL=http://www.advanced-monolithic.com/pdf/ds1117.pdf, Device Class L1="Integrated Circuits (ICs)", Device Class L2="Power Management ICs", Device Class L3="Voltage Regulators - Linear", Height=1.8mm, Ipc Land Pattern Name=SOT229P700X180-4, Lead Free=Yes, Manufacturer Part Number=AMS1117-3.3, Number Of Outputs=1, Octopart=https://octopart.com/ams1117-3.3-advanced+monolithic+systems-25899300, Output Type=Fixed, RoHS=TRUE, Standoff Height=0.64mm, Supplier=RS, Temperature Range High=+125°C
U?: library part CMP-0243-00165-1, "ARM Cortex-M4 32-bit MCU+FPU, 512 KB Flash, 128 KB RAM, 36 I/Os, 48-Pin UFQFPN, -40 to 85 degC, Tray", I/Os (High Current)=36, Operating Frequency(F) (Processor speed) (MHz)=100, Package Description=UFQFPN48, Package Reference="48-Pin Ultra Thin Fine Pitch Quad Flat No-Lead, 7 x 7 x 0.6 mm Body, 0.5 mm Pitch, Exposed Pad", Supply Voltage(Vcc) min (V)=1.7, ComponentLink1Description="Manufacturer URL", ComponentLink1URL=http://www.st.com/, ComponentLink2Description=Datasheet, ComponentLink2URL=http://www.st.com/st-web-ui/static/active/en/resource/technical/document/datasheet/DM00115249.pdf, Core="ARM Cortex-M4", DatasheetVersion="Rev. 6", FLASH Size (Prog) (kB)=512, Internal RAM Size (kB)=128, Mounting Technology="Surface Mount", Packing=Tray

## Free pads (board coordinates)
  round 3 hole 2: 3(145.212,87.96) 5(109.957,54.762) 6(110.007,88.011) 7(145.313,54.737)
  round 1.524 hole 0.762: 4(109.957,54.762)

## Via types
v1: diameter 0.5, hole 0.2, L1 (Signal) to L4 (Signal), 29 vias
v2: diameter 0.7, hole 0.3, L1 (Signal) to L4 (Signal), 23 vias
v3: diameter 0.7, hole 0.5, L1 (Signal) to L4 (Signal), 1 vias
v4: diameter 0.4, hole 0.3, L1 (Signal) to L4 (Signal), 1 vias

## Nets (pads, with @x,y where several pads share a name; then routed paths per layer and width w, separated by ;. In a path a pad name is that pad's centre, name@x,y a point inside that pad or via, vN(x,y) a via of type N, cw(c..) or ccw(c..) an arc to the next point about the centre after c; other vN are vias at no path point)
+3v3: 6_Pins_Connector_SPI.1 6_Tag-Connect.1 C4.1 C5.1 C7.2 C13.1 C14.1 C15.1 C16.1 C17.1 C18.1 Greenn_LED.2 Inertia_Sensor.8 Inertia_Sensor.13 R3.2 R5.2 R6.2 Regulator.2 Regulator.4 U?.1 U?.9 U?.24 U?.36 U?.48 | length 184.8
  L1 (Signal) w0.254: U?.24 125.313,69.251
  L1 (Signal) w0.3: 112.026,84.697 Inertia_Sensor.8
  L1 (Signal) w0.381: 117.43,76.372 118.501,76.372 ; 117.576,70.564 117.576,70.688 U?.9@118.262,71.374 ; 118.829,76.7 118.501,76.372 ; U?.48 118.823,76.051 118.501,76.372 ; 125.313,69.251 125.506,69.058 126.014,69.058 ; U?.36 125.418,76.059
  L1 (Signal) w0.4: 111.602,85.121 112.026,84.697 ; 113.487,80.432 Inertia_Sensor.13@113.487,81.876
  L1 (Signal) w0.508: 125.418,76.059 125.934,76.059 126.205,75.787 C18.1
  L1 (Signal) w0.6: 111.602,85.121 111.571,85.09 C7.2 110.894,85.982 110.747,86.129 ; v2(112.268,77.648) 112.195,77.721 112.195,79.121 ; 113.443,80.432 C5.1 ; C17.1 114.427,76.523 113.443,77.507 C5.1 ; v2(114.859,68.224) 116.25,68.224 116.758,68.732 ; v2(116.611,77.876) 116.599,77.864 116.599,76.385 C13.1 117.43,76.372 118.399,75.404 117.94,75.404 117.72,75.184 117.72,75.175 v2(116.865,74.32) ; 6_Pins_Connector_SPI.1@116.758,57.973 116.758,68.732 ; 117.576,70.564 C14.1 116.758,70.482 116.758,68.732 ; 118.829,76.7 119.001,76.872 119.001,78.837 C15.1 ; R6.2 125.084,85.917 125.247,86.081 ; C18.1@127.254,75.809 127.39,75.945 127.412,75.945 129.572,78.105 v2(130.658,78.105) ; v2(127.482,68.76) 127.455,68.76 126.937,69.278 126.233,69.278 126.014,69.058 126.014,68.046 126.233,67.827 126.233,67.315 C16.1 126.238,66.7 131.851,61.087 137.574,61.087 139.523,63.036 139.624,63.036 Regulator.2 Regulator.4 140.15,56.522 141.159,57.531 144.526,57.531 145.39,58.395 145.39,59.314 145.892,59.817 C4.1 ; R5.2 129.642,86.081 ; 6_Tag-Connect.1 132.544,80.645 134.183,82.284 ; v2(134.844,79.36) 134.844,80.371 134.183,81.031 134.183,82.284 ; 110.747,86.129 111.741,87.122 116.23,87.122 117.272,86.081 125.247,86.081 ; 110.747,86.129 109.465,86.129 109.319,85.982 109.319,80.749 110.947,79.121 112.195,79.121 ; 112.195,79.121 C5.1 ; 125.247,86.081 129.642,86.081 ; 129.642,86.081 132.944,86.081 134.183,84.841 R3.2 134.183,82.284
  L4 (Signal) w0.6: v2(112.268,77.648) 116.275,77.648 116.503,77.876 v2(116.611,77.876) ; v2(114.859,68.224) 112.649,68.224 111.912,68.961 111.912,72.339 114.935,75.362 115.824,75.362 v2(116.865,74.32) ; v2(127.482,68.76) 127.501,68.779 127.501,69.005 129.337,70.841 131.013,70.841 136.779,76.606 136.779,81.915 135.331,83.363 132.163,83.363 129.896,81.096 129.227,81.096 128.963,80.832 128.963,79.189 129.227,78.925 130.728,78.925 130.947,78.705 130.947,78.395 v2(130.658,78.105) ; v2@130.947,78.104 134.315,78.104 134.824,78.614 134.824,79.341 v2(134.844,79.36)
+5: C2.1 C3.1 FB.2 Regulator.3 | length 16.4
  L1 (Signal) w0.3: FB.2 134.703,70.994 134.239,70.53 C2.1 134.225,69.799 133.147,69.799 132.207,68.859 132.207,66.39 132.353,66.243 137.679,66.243 137.963,65.959 C3.1@137.461,65.456 ; Regulator.3 137.486,63.188 C3.1@137.486,65.456
GND: 6_Pins_Connector_SPI.6 6_Tag-Connect.5 C1.2 C2.2 C3.2 C4.2 C5.2 C6.2 C7.1 C8.2 C10.2 C11.2 C12.2 C13.2 C14.2 C15.2 C16.2 C17.2 C18.2 Crystal.2 Crystal.4 Inertia_Sensor.1 Inertia_Sensor.9 Inertia_Sensor.11 Inertia_Sensor.18 Inertia_Sensor.25 J.5 R1.1 R2.1 R4.2 Regulator.1 U?.8 U?.23 U?.35 U?.47 U?.49 | length 163.3
  L1 (Signal) w0.3: 110.219,84.197 Inertia_Sensor.9 Inertia_Sensor.25@113.983,84.197 ; 112.134,83.21 Inertia_Sensor.11@112.833,83.21 ; Inertia_Sensor.25@115.333,84.522 116.058,85.247 Inertia_Sensor.1 ; Inertia_Sensor.25@115.358,83.321 116.058,82.621 Inertia_Sensor.18
  L1 (Signal) w0.4: 111.039,82.115 112.134,83.21 ; Inertia_Sensor.18@116.084,81.946 116.865,81.165 ; U?.49@119.761,74.917 U?.47@119.761,75.804 ; U?.47@119.774,76.054 119.774,77.864
  L1 (Signal) w0.508: 112.164,66.118 Crystal.2@112.664,65.617 ; 117.011,81.165 117.888,82.042 118.693,82.042 C8.2@118.693,81.966 ; 117.301,71.904 U?.8@118.618,71.904 ; U?.8 119.472,71.901 119.818,71.555 v1(119.818,71.551) ; U?.49@124.224,74.854 124.274,74.904 125.649,74.904 125.675,74.93 C18.2
  L1 (Signal) w0.6: C7.1 110.114,85.063 110.114,84.303 ; 110.219,84.197 110.114,84.303 ; 111.039,82.115 110.366,82.115 110.114,82.368 110.114,84.303 ; 111.252,68.961 111.283,68.93 111.283,66.748 111.314,66.717 111.364,66.717 111.964,66.118 112.164,66.118 ; 111.298,68.961 112.086,68.174 113.613,68.174 113.759,68.32 113.759,68.906 C10.2 113.861,68.961 113.997,69.097 113.997,69.144 115.67,70.817 ; v2(112.649,74.625) 114.702,74.625 115.159,74.168 v2(115.164,74.168) ; Crystal.2@112.664,65.617 Crystal.2@112.714,65.617 ; C5.2 C5.2@114.321,79.121 ; 114.706,74.625 114.427,74.905 C17.2 114.913,75.644 ; 114.913,75.582 115.409,75.582 ; v2(115.062,71.577) 115.062,71.469 115.492,71.039 115.492,70.995 115.67,70.817 ; C13.2 116.524,75.582 115.409,75.582 ; 116.776,80.785 115.113,79.121 C5.2@114.321,79.121 ; 116.865,81.165 116.865,80.696 v2(117.399,80.162) ; 117.301,71.904 116.84,71.443 C14.2 116.275,71.422 115.67,70.817 ; 119.774,77.864 120.396,78.486 C15.2 120.396,80.239 121.001,80.843 R2.1 121.92,81.991 122.25,82.321 v2(123.393,82.321) ; 6_Pins_Connector_SPI.6@122.926,57.891 122.926,61.41 125.36,63.843 ; v3(123.546,64.77) 123.558,64.757 v4@124.574,64.757 ; U?.49@124.224,70.454 124.274,70.404 124.274,68.396 C16.2@125.355,67.314 ; v4(124.587,64.745) 125.381,64.745 ; 125.381,63.864 125.381,63.951 ; 125.381,63.981 125.381,64.332 ; C16.2 125.381,64.745 ; R4.2 128.529,66.324 129.575,65.278 v2(130.759,65.278) ; v2(128.702,82.118) 128.73,82.147 130.026,82.147 ; 6_Tag-Connect.5 129.413,81.534 130.026,82.147 ; C12.2 130,82.172 130.026,82.147 ; v2(134.061,67.767) 134.061,67.875 134.239,68.053 C2.2 134.302,68.897 138.239,68.897 C1.2 143.925,68.834 144.145,69.054 144.145,73.736 143.676,74.205 J.5 ; C1.2@138.303,68.81 140.213,66.9 140.213,66.543 C3.2 140.716,65.814 141.219,65.311 141.445,65.311 141.99,64.766 Regulator.1 145.154,63.112 145.697,62.57 C4.2 146.149,62.57 146.652,62.067 146.652,61.841 147.371,61.122 147.371,59.588 146.853,59.071 146.853,58.76 147.352,58.261 ; 147.383,58.23 147.464,58.149 R1.1 ; R1.1@147.574,57.438 147.574,56.836 147.354,56.617 142.875,56.617 141.148,54.889 138.153,54.889 137.391,55.651 134.061,55.651 125.381,64.332 ; C5.2@114.321,79.121 114.458,78.985 114.458,78.963 115.409,78.012 115.409,75.582 ; 125.381,64.332 125.381,64.745
  L1 (Signal) w0.8: v3(123.546,64.77) 124.13,65.354 124.13,66.883 C11.2
  L4 (Signal) w0.6: v2(115.062,71.577) 114.122,72.517 114.122,72.847 115.144,73.869 115.144,74.149 v2(115.164,74.168) ; v2(123.393,82.321) 123.501,82.321 123.705,82.118 v2(128.702,82.118) ; v2(130.759,65.278) 131.572,65.278 v2(134.061,67.767)
  other v1: 119.818,70.451 120.918,70.451 122.018,70.451 123.118,70.451 124.218,70.451 120.918,71.551 122.018,71.551 123.118,71.551 124.218,71.551 119.818,72.651 120.918,72.651 122.018,72.651 123.118,72.651 124.218,72.651 119.818,73.751 120.918,73.751 122.018,73.751 123.118,73.751 124.218,73.751 119.818,74.851 120.918,74.851 122.018,74.851 123.118,74.851 124.218,74.851 114.258,83.397 115.358,83.397 114.258,84.497 115.358,84.497
IMU_CPOUT: C8.1 Inertia_Sensor.20 | length 2.1
  L1 (Signal) w0.3: Inertia_Sensor.20 118.443,83.197 118.565,83.074 118.589,83.074 118.745,82.918 C8.1
IMU_INT: Inertia_Sensor.12 U?.45 | length 13.3
  L1 (Signal) w0.3: v2(111.912,81.051) 112.833,81.972 Inertia_Sensor.12
  L1 (Signal) w0.381: 120.568,76.968 120.675,76.86 U?.45@120.675,76.352
  L1 (Signal) w0.508: 120.568,76.968 v2@120.568,77.502
  L1 (Signal) w0.6: v2(120.548,77.521) v2@120.568,77.502
  L4 (Signal) w0.6: v2(111.912,81.051) 112.42,80.543 115.57,80.543 118.593,77.521 v2(120.548,77.521)
IMU_REGOUT: C6.1 Inertia_Sensor.10 | length 2
  L1 (Signal) w0.3: C6.1 111.019,83.312 111.156,83.448 111.156,83.47 111.379,83.693 112.829,83.693 Inertia_Sensor.10
IMU_SCL: Inertia_Sensor.23 R5.1 U?.42 | length 22.2
  L1 (Signal) w0.3: Inertia_Sensor.23 118.681,84.697 v2(119.253,84.125) ; U?.42@122.274,76.054 122.274,76.935 127.37,82.031 127.37,83.022 127.395,83.047 127.395,84.038 127.37,84.063 ; v2(126.695,83.388) 127.37,84.063 ; R5.1 127.37,84.063
  L4 (Signal) w0.3: v2(119.253,84.125) 119.953,84.125 120.69,83.388 v2(126.695,83.388)
IMU_SDA: Inertia_Sensor.24 R6.1 U?.43 | length 20.3
  L1 (Signal) w0.3: Inertia_Sensor.24 123.032,85.197 124.409,83.82 125.984,83.82 ; U?.43@121.774,76.054 121.774,77.501 125.984,81.712 125.984,83.82 ; R6.1 125.984,83.82
LED_PWR_K: Greenn_LED.1 R1.2 | length 0.9
  L1 (Signal) w0.3: Greenn_LED.1@145.762,57.548 R1.2
MCU_BOOT0: R2.2 U?.44 | length 4.2
  L1 (Signal) w0.3: U?.44@121.274,76.054 121.274,78.068 121.92,78.715 R2.2
MCU_LED_A: Red_LED.1 U?.26 | length 2.8
  L1 (Signal) w0.3: U?.26@125.424,70.404 128.205,70.404 Red_LED.1
MCU_LED_K: R4.1 Red_LED.2 | length 3.5
  L1 (Signal) w0.3: Red_LED.2 129.515,69.748 129.515,67.412 129.394,67.291 129.394,67.269 129.307,67.183 R4.1
MCU_NRST: 6_Tag-Connect.3 C12.1 R3.1 U?.7 | length 40.8
  L1 (Signal) w0.3: v2(115.57,72.238) 115.678,72.238 115.845,72.404 U?.7@118.624,72.404 ; 6_Tag-Connect.3 130.556,80.772 130.556,81.686 130.858,81.988 ; v2(132.588,82.321) 131.823,82.321 131.489,81.988 130.858,81.988 ; R3.1 133.215,84.138 130.921,84.138 C12.1 130.858,81.988
  L4 (Signal) w0.3: v2(115.57,72.238) 115.647,72.161 115.877,72.161 115.902,72.136 130.431,72.136 135.941,77.646 135.941,80.594 134.214,82.321 v2(132.588,82.321)
MCU_OSC_IN: Crystal.1 U?.5 | length 15.1
  L1 (Signal) w0.3: Crystal.1@111.314,65.617 110.591,65.617 110.445,65.763 110.445,68.961 110.445,70.516 113.333,73.404 U?.5@118.624,73.404
MCU_OSC_OUT: R7.2 U?.6 | length 5.9
  L1 (Signal) w0.3: R7.2 113.436,71.247 115.093,72.904 U?.6@118.624,72.904
MCU_PA4: 6_Pins_Connector_SPI.2 U?.14 | length 12.1
  L1 (Signal) w0.3: 6_Pins_Connector_SPI.2@117.926,57.891 117.958,57.923 117.958,61.747 119.774,63.563 U?.14@119.774,69.254
MCU_PA5: 6_Pins_Connector_SPI.3 U?.15 | length 11.8
  L1 (Signal) w0.3: 6_Pins_Connector_SPI.3@119.176,57.891 119.176,61.645 120.274,62.743 U?.15@120.274,69.254
MCU_PA6: 6_Pins_Connector_SPI.4 U?.16 | length 11.5
  L1 (Signal) w0.3: 6_Pins_Connector_SPI.4@120.426,57.891 120.426,61.422 120.774,61.769 U?.16@120.774,69.254
MCU_PA7: 6_Pins_Connector_SPI.5 U?.17 | length 11.5
  L1 (Signal) w0.3: U?.17@121.274,69.254 121.274,61.812 121.618,61.468 121.618,57.949 6_Pins_Connector_SPI.5@121.676,57.891
MCU_SWCLK: 6_Tag-Connect.4 U?.37 | length 7.4
  L1 (Signal) w0.3: U?.37@124.774,76.054 124.774,76.279 124.799,76.304 125.024,76.304 125.402,76.683 127.229,76.683 129.16,78.614 129.922,78.614 6_Tag-Connect.4
MCU_SWDIO: 6_Tag-Connect.2 U?.34 | length 9.3
  L1 (Signal) w0.3: U?.34@125.424,74.404 128.176,74.404 ; 131.794,78.022 131.794,79.216 6_Tag-Connect.2
  L1 (Signal) w0.584: 128.176,74.404 131.794,78.022
MCU_SWO: 6_Tag-Connect.6 U?.39 | length 7.9
  L1 (Signal) w0.3: U?.39@123.774,76.054 123.774,76.606 127.203,80.035 128.499,80.035 129.159,79.375 6_Tag-Connect.6
MCU_VCAP1: C11.1 U?.22 | length 2.7
  L1 (Signal) w0.3: C11.1 122.792,68.308 122.923,68.44 123.571,68.44 123.774,68.642 U?.22@123.774,69.254
USB_D_N: J.2 U?.32 | length 17.8
  L1 (Signal) w0.26: U?.32 140.162,73.401 141.308,72.255 J.2
USB_D_P: J.3 U?.33 | length 17.7
  L1 (Signal) w0.26: U?.33@125.424,73.904 125.429,73.909 140.67,73.909 141.674,72.905 J.3
VBUS: C1.1 FB.1 J.1 | length 7.1
  L1 (Signal) w0.3: C1.1 FB.1 139.573,72.136 140.104,71.605 J.1
XTAL_IN: C10.1 Crystal.3 R7.1 | length 12.1
  L1 (Signal) w0.6: R7.1 112.637,71.171 112.61,71.171 112.561,71.122 112.561,70.241 ; Crystal.3 115.132,66.497 115.436,66.802 v2(115.545,66.802) ; C10.1 112.961,68.961 112.561,69.361 112.561,70.241 ; v2(114.478,70.866) 114.478,70.819 113.9,70.241 112.561,70.241
  L4 (Signal) w0.6: v2(114.478,70.866) 115.697,69.647 115.697,67.063 115.545,66.91 v2(115.545,66.802)
pads on no net: 6_Pins_Connector_SPI.7 6_Pins_Connector_SPI.8 6_Tag-Connect. Inertia_Sensor.2 Inertia_Sensor.3 Inertia_Sensor.4 Inertia_Sensor.5 Inertia_Sensor.6 Inertia_Sensor.7 Inertia_Sensor.14 Inertia_Sensor.15 Inertia_Sensor.16 Inertia_Sensor.17 Inertia_Sensor.19 Inertia_Sensor.21 Inertia_Sensor.22 J.4 J.6 J.7 J.8 J.9 J.10 J.11 U?.2 U?.3 U?.4 U?.10 U?.11 U?.12 U?.13 U?.18 U?.19 U?.20 U?.21 U?.25 U?.27 U?.28 U?.29 U?.30 U?.31 U?.38 U?.40 U?.41 U?.46
copper on no net: | length 155.3
  L1 (Signal) w0.254: 106.807,53.848 108.407,52.248 146.101,52.248 148.158,54.305 148.158,89.032 146.512,90.678 108.712,90.678 106.807,88.773 106.807,88.519 106.807,53.848

## Polygon pours and split planes (outlines as drawn)
+3v3 on L1 (Signal) "+3V3_L01_P004" (solid, pour order 4): 145.034,59.411 145.034,58.649 144.374,57.988 143.916,57.988 143.916,57.887 143.891,57.861 140.818,57.861 140.335,57.379 140.132,57.582 140.132,63.729 139.395,62.992 139.065,62.992 139.065,62.916 137.566,61.417 137.287,61.697 132.512,61.697 132.512,60.706 132.537,60.681 132.613,60.757 137.82,60.757 137.82,60.985 139.09,62.255 139.344,62.001 139.344,57.455 138.659,57.455 138.557,57.353 138.557,55.702 140.716,55.702 141.046,56.032 141.046,56.769 141.402,57.125 145.059,57.125 145.059,57.556 145.669,58.166 145.745,58.166 145.745,58.826 146.507,59.588
VBUS on L1 (Signal) "VBUS_L01_P001" (solid, pour order 1): 138.836,69.291 138.862,69.317 139.395,69.317 141.427,71.349 143.586,71.349 143.586,71.933 143.612,71.958 143.586,71.984 140.411,71.984 139.395,73 137.312,73 137.312,69.342 137.363,69.291 138.773,69.406
+5 on L1 (Signal) "+5_L01_P003" (solid, pour order 3): 133.731,71.145 133.731,70.358 133.248,70.358 131.775,68.885 131.775,65.913 136.703,65.913 137.033,65.583 137.033,64.084 137.058,64.059 136.881,63.881 136.5,63.881 136.5,62.425 136.771,62.154 137.998,62.154 138.405,62.56 138.455,62.56 138.455,63.703 138.176,63.983 138.074,63.983 138.074,64.491 138.024,64.541 138.074,64.541 138.074,65.024 138.709,65.024 138.709,67.005 138.735,67.031 138.709,67.056 137.185,67.056 137.185,66.675 137.084,66.573 137.058,66.599 132.867,66.599 132.867,68.631 132.766,68.732 133.401,69.367 134.874,69.367 134.976,69.469 134.976,70.79 135.585,71.399 135.585,72.873 135.56,72.847 133.782,72.847 133.782,71.196
GND on L1 (Signal) "GND_L01_P008" (solid, pour order 8): 146.126,61.798 144.856,61.798 144.856,62.763 144.805,62.814 143.205,62.814 143.205,62.459 142.9,62.154 141.072,62.154 141.072,63.856 141.021,63.906 141.275,64.16 141.58,64.16 141.58,64.668 141.402,64.846 139.802,64.846 139.7,64.948 139.776,65.024 139.776,66.624 139.471,66.929 139.471,67.107 140.005,67.64 140.487,67.158 141.453,67.158 141.478,67.183 141.783,66.878 141.783,65.354 142.596,64.541 142.596,64.059 142.85,64.059 143.129,63.779 143.078,63.729 143.078,63.424 146.837,63.424 146.99,63.271 146.99,61.976 147.523,61.443 147.523,61.366 147.117,60.96 146.761,61.316 146.609,61.316
no net on L2 (GND) "NONET_L02_P005" (solid, pour order 5): 107.616,54.762 107.616,86.756 cw(c110.156,86.756) 108.36,88.552 109.546,89.738 cw(c110.037,89.248) 110.037,89.941 145.182,89.941 cw(c145.182,87.401) 147.722,87.401 147.722,55.524 cw(c145.182,55.524) 145.182,52.984 109.267,52.984 cw(c109.267,54.61) 107.641,54.61
no net on L3 (GND) "NONET_L03_P007" (solid, pour order 7): 107.604,54.712 107.604,86.705 cw(c110.144,86.705) 108.348,88.501 109.534,89.687 cw(c110.025,89.197) 110.025,89.891 145.171,89.891 cw(c145.171,87.351) 147.711,87.351 147.711,55.474 cw(c145.171,55.474) 145.171,52.934 109.255,52.934 cw(c109.255,54.559) 107.629,54.559

## Silkscreen, mask and mechanical layers (free items; w line width, h text height)
Top Overlay:
  text "STM32_Project" at 119.355,87.731 h1.52
  text "ASU_RT" at 137.312,83.185 h1.52
  text "SWD" at 131.394,74.27 h1.52
  text "USB" at 142.367,65.862 h1.52
  text "GPIO" at 127.432,54.356 h1.52

## Text inside footprints (layer, text, board x,y; h text height)
Greenn_LED: Top Overlay "+" at 144.095,57.881 h0.7 r180